# Altium PCB SiLPA_HE.PcbDoc (part 3 of 10)
Units mm, origin at the board's own origin, x right, y up, seen from the top; angles counter-clockwise.
Board outline 222.47 x 100.01 mm, 4 copper layers (Top Layer, Int1 (GND), Int2 (PWR), Bottom Layer), stack 1.508 mm thick; 661 components, 355 nets, 1925 pads, 1744 vias.
Unrouted connection lines stored in the file: 360.
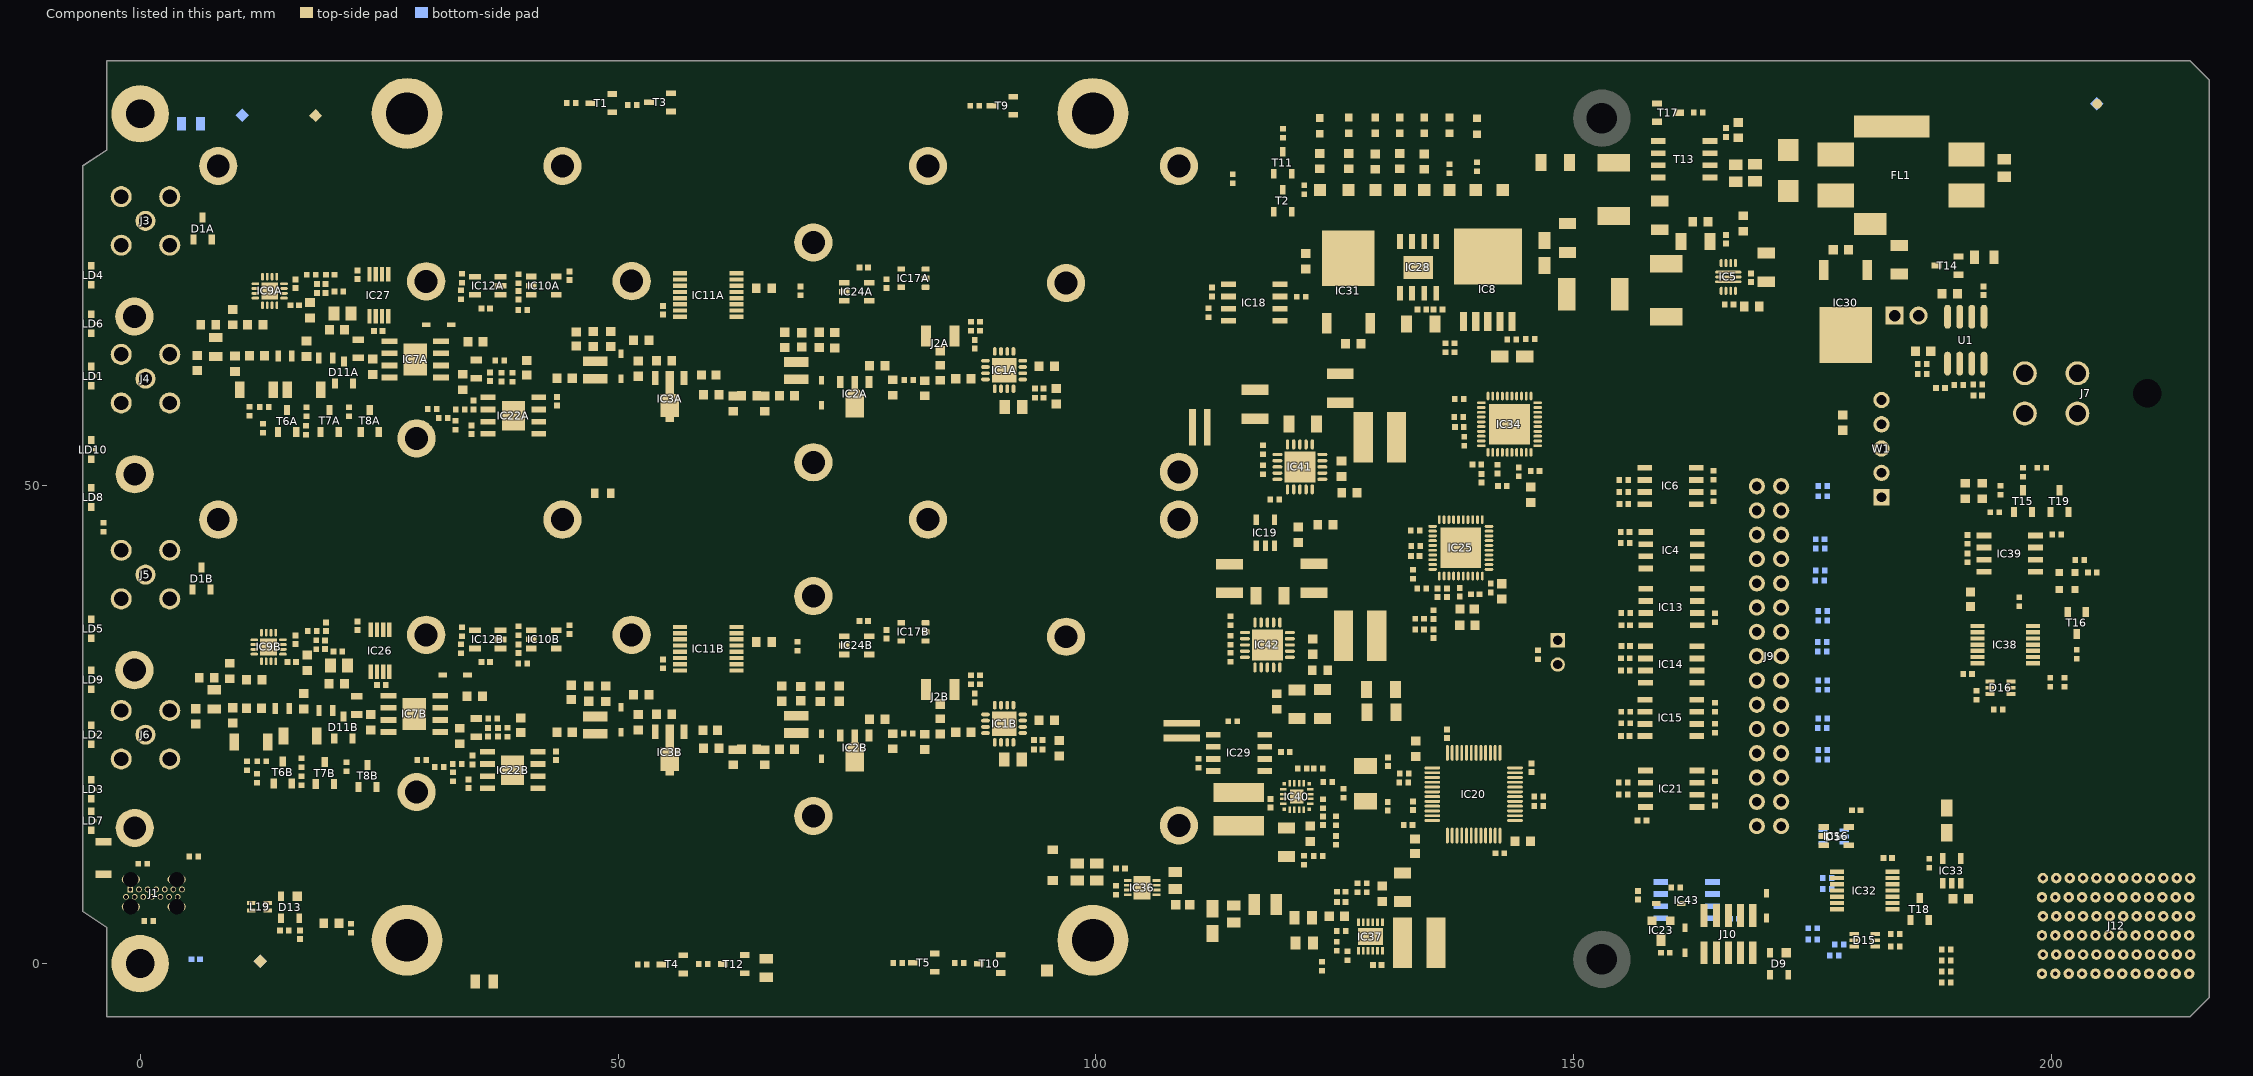
[diagram p4: the components of this part, seen from the top]

## Part data (continued)
C4A C4B C9A C9B C42A C42B C94: library part CC0603_4.7UF_16V_10%_X5R, "Non-polarised capacitor", Case=0603, Manufacturer=GENERIC, Manufacturer1 ComponentHeight=0.95mm, Manufacturer1 Example="TAIYO YUDEN", Manufacturer1 Part Number=EMK107ABJ475KA-T, Tolerance=±10%, Voltage=16V, Author="CERN DEM JLC", Component Type=Standard, CreateDate=16.12.2013, HelpURL=\\cern.ch\dfs\Applications\Altium\Datasheets\CC0603_X7R_TAIYO-YUDEN_HIGH-VALUE.pdf, LatestRevisionDate=16.09.2014, Manufacturer Part Number=CC0603_4.7UF_16V_10%_X5R, Mounted=Yes, Part Description="SMD Multilayer Chip Ceramic Capacitor", Part Number=CC0603_4.7UF_16V_10%_X5R, Pin Count=2, Sense=No, SMD=Yes, Socket=No, Status=None, TC=X5R
C5A C5B C8A C8B: library part CC0603_100NF_50V_10%_X7R, "Non-polarised capacitor", Case=0603, Manufacturer=GENERIC, Manufacturer1 ComponentHeight=0.87mm, Manufacturer1 Example=PHYCOMP, Manufacturer1 Part Number=223858615649, Tolerance=±10%, Voltage=50V, Author="CERN DEM JLC", Component Type=Standard, CreateDate=03.12.2007, HelpURL=\\cern.ch\dfs\Applications\Altium\Datasheets\CC0603_X7R_PHYCOMP.pdf, LatestRevisionDate=03.12.2007, Manufacturer Part Number=CC0603_100NF_50V_10%_X7R, Mounted=Yes, Part Description="SMD Multilayer Chip Ceramic Capacitor", Part Number=CC0603_100NF_50V_10%_X7R, Pin Count=2, Sense=No, SMD=Yes, Socket=No, Status=Preferred, TC=X7R
C6A C6B C7A C7B C11A C11B C12A C12B C13A C13B C14A C14B C15A C15B C16A C16B C46A C46B: library part CC0603_680PF_50V_5%_NP0, "Non-polarised capacitor", Case=0603, Manufacturer=GENERIC, Manufacturer1 ComponentHeight=0.87mm, Manufacturer1 Example=PHYCOMP, Manufacturer1 Part Number=223886715681, Tolerance=±5%, Voltage=50V, Author="CERN DEM JLC", Component Type=Standard, CreateDate=03.12.2007, HelpURL=\\cern.ch\dfs\Applications\Altium\Datasheets\CC0603_NP0_PHYCOMP.pdf, LatestRevisionDate=03.12.2007, Manufacturer Part Number=CC0603_680PF_50V_5%_NP0, Mounted=Yes, Part Description="SMD Multilayer Chip Ceramic Capacitor", Part Number=CC0603_680PF_50V_5%_NP0, Pin Count=2, Sense=No, SMD=Yes, Socket=No, Status=Preferred, TC=C0G/NP0
C10 C19A C19B C29 C32 C34 C36 C56A C56B C57A C57B C58A C58B C61A C61B C62 C63 C64 C65 C66 C67 C79 C80 C81 C90 C92 C95 C100 C105 C116 C122 C143 C155 C165 C167 C245A C245B: library part CC0402_100NF_16V_10%_X5R, "Non-polarised capacitor", Case=0402, Manufacturer=GENERIC, Manufacturer1 ComponentHeight=0.55mm, Manufacturer1 Example=MURATA, Manufacturer1 Part Number=GRM155R61C104KA88D, Tolerance=±10%, Voltage=16V, Author="CERN DEM JLC", Component Type=Standard, HelpURL=\\cern.ch\dfs\Applications\Altium\Datasheets\CC0402_X5R_MURATA_GRM.pdf, Manufacturer Part Number=CC0402_100NF_16V_10%_X5R, Mounted=Yes, Part Description="SMD Multilayer Chip Ceramic Capacitor", Part Number=CC0402_100NF_16V_10%_X5R, Pin Count=2, SMD=Yes, Socket=No, Status=None, TC=X5R
  C10 C19A C19B C29 C32 C34 C36 C56A C56B C57A C57B C58A C58B C61A C61B C62 C63 C64 C65 C67 C90 C92 C95 C100 C105 C116 C122 C143 C155 C165 C167 C245A C245B: CreateDate=10.12.2013, LatestRevisionDate=10.12.2013, Sense=No
  C66 C79 C80 C81: CreateDate=2013-12-10, LatestRevisionDate=2013-12-10, Table="Capacitors SMD"
C17A C17B C51A C51B C59A C59B: library part CC0402_100PF_50V_5%_C0G, "Non-polarised capacitor", Case=0402, Manufacturer=GENERIC, Manufacturer1 ComponentHeight=0.55mm, Manufacturer1 Example=KEMET, Manufacturer1 Part Number=C0402C101J5GACTU, Tolerance=±5%, Voltage=50V, Author="CERN DEM JLC", Component Type=Standard, HelpURL="\\cern.ch\dfs\Applications\Altium\Datasheets\CC0805_C0G_KEMET_(Commercial Grade).pdf", Manufacturer Part Number=CC0402_100PF_50V_5%_C0G, Mounted=Yes, Part Description="SMD Multilayer Chip Ceramic Capacitor", Part Number=CC0402_100PF_50V_5%_C0G, Pin Count=2, Sense=No, SMD=Yes, Socket=No, Status=Preferred, TC=C0G/NP0
  C17A C17B: CreateDate=2007-12-03, LatestRevisionDate=2015-04-22
  C51A C51B C59A C59B: CreateDate=03.12.2007, LatestRevisionDate=22.04.2015